# Altium PCB ZigBug_V1.1.PcbDoc
Units mil, origin at the board's own origin, x right, y up, seen from the top; angles counter-clockwise.
Board outline 1800 x 2750 mil, 4 copper layers (Top Layer, GND, VCC, Bottom Layer), stack 30.634 mil thick; 89 components, 64 nets, 356 pads, 73 vias.
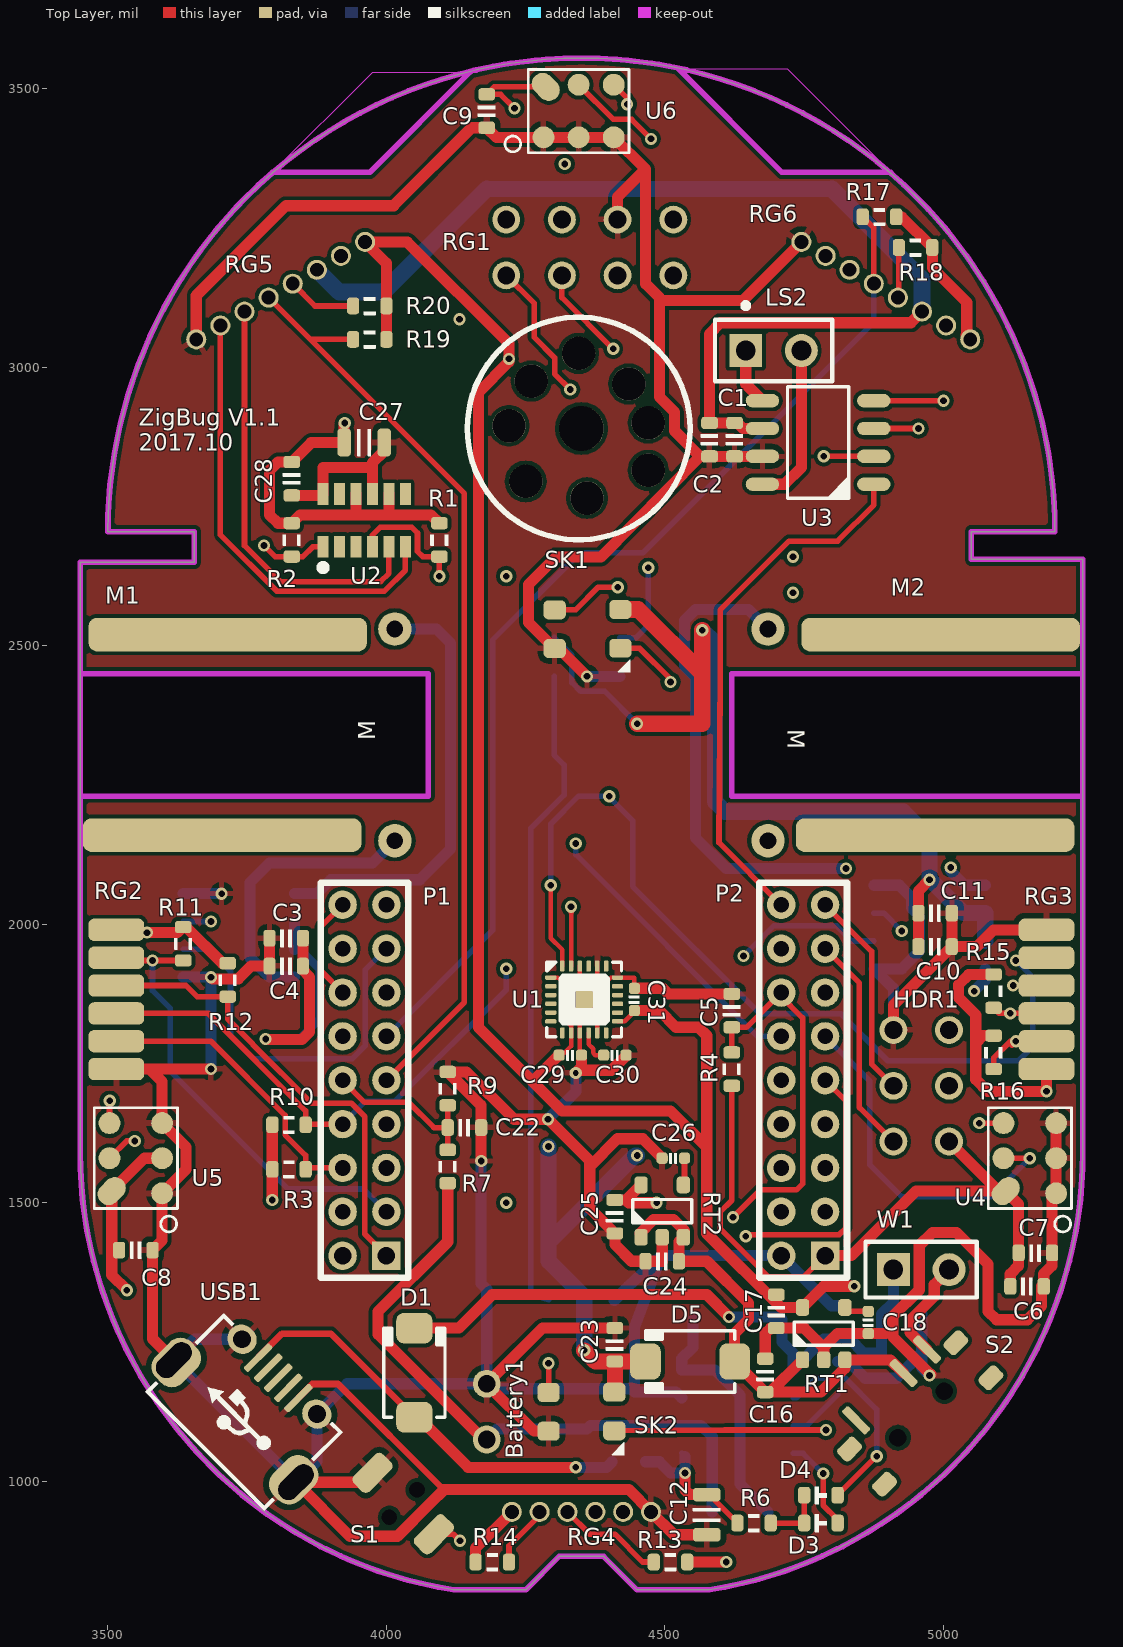
[diagram p0: Top Layer view]
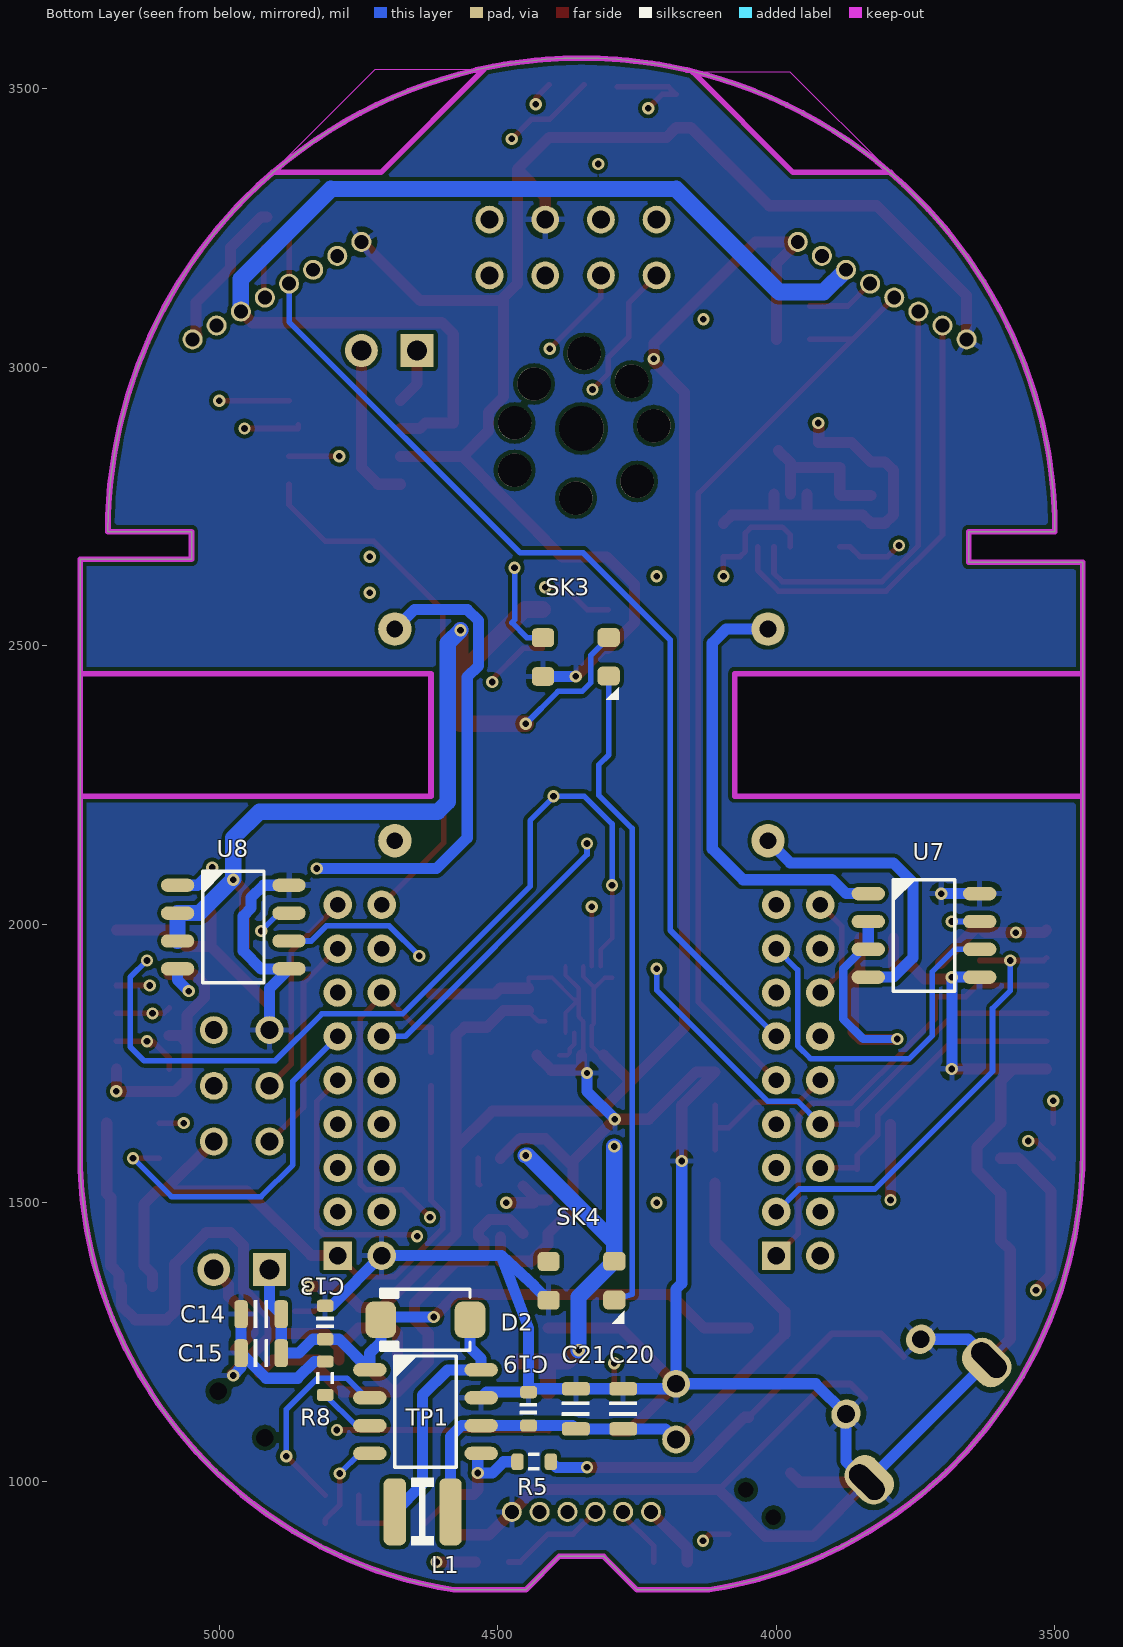
[diagram p1: Bottom Layer view, seen from below]
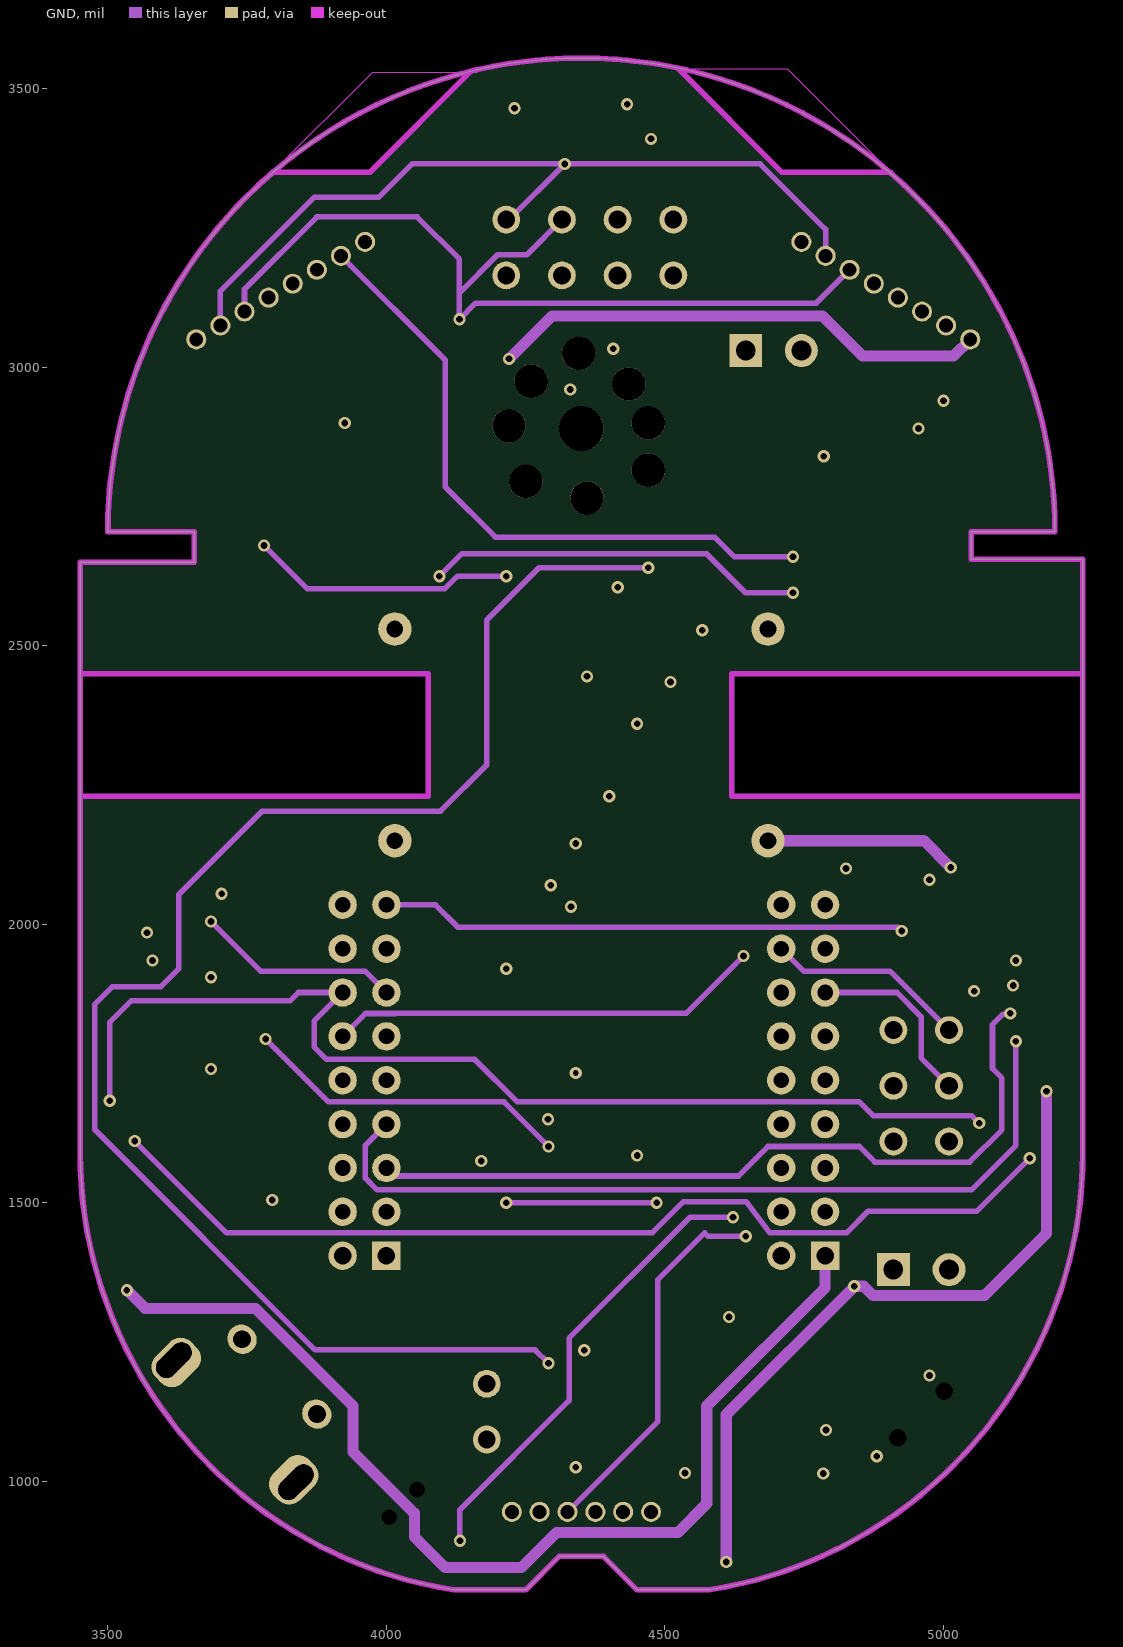
[diagram p2: GND]
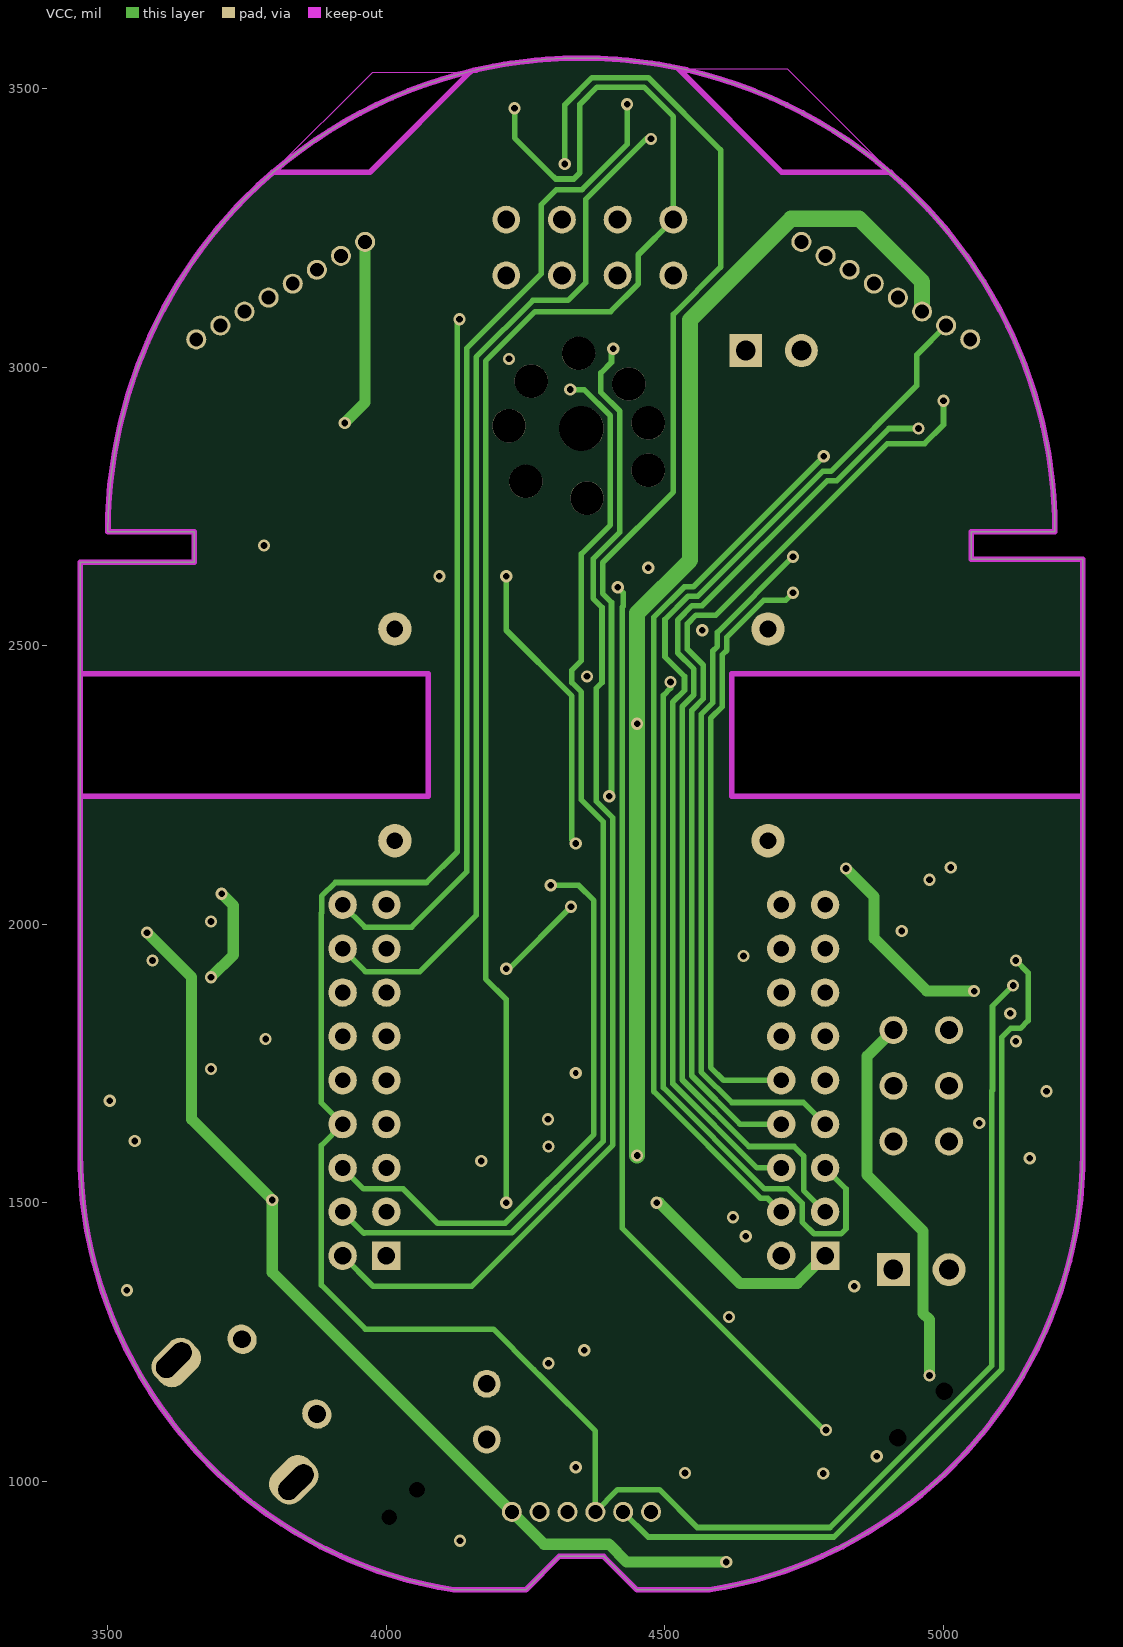
[diagram p3: VCC]
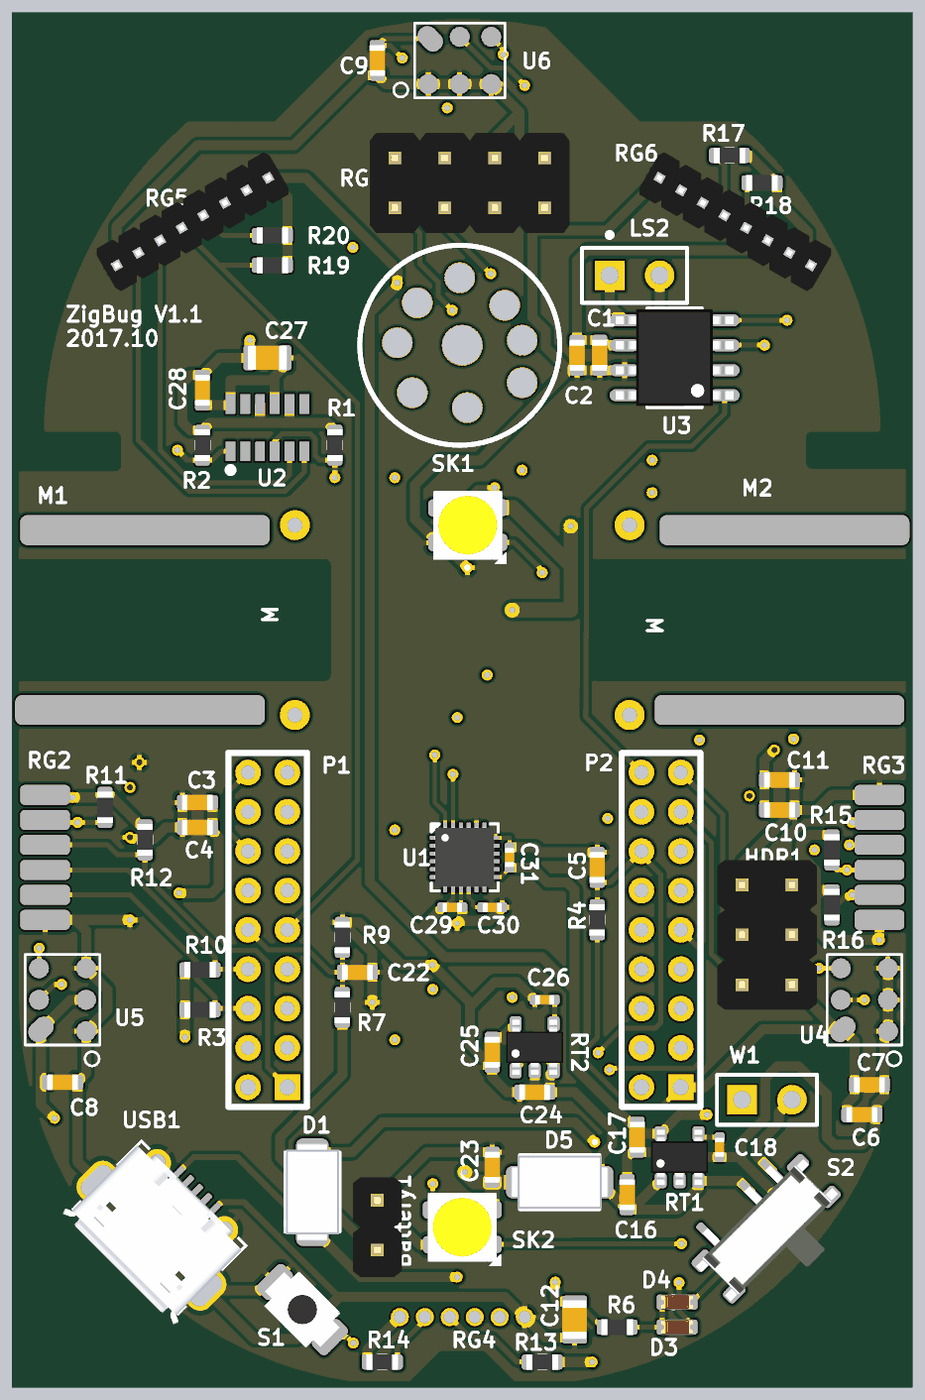
[diagram p4: 3D render of the assembled board from above, using the file's embedded part models]
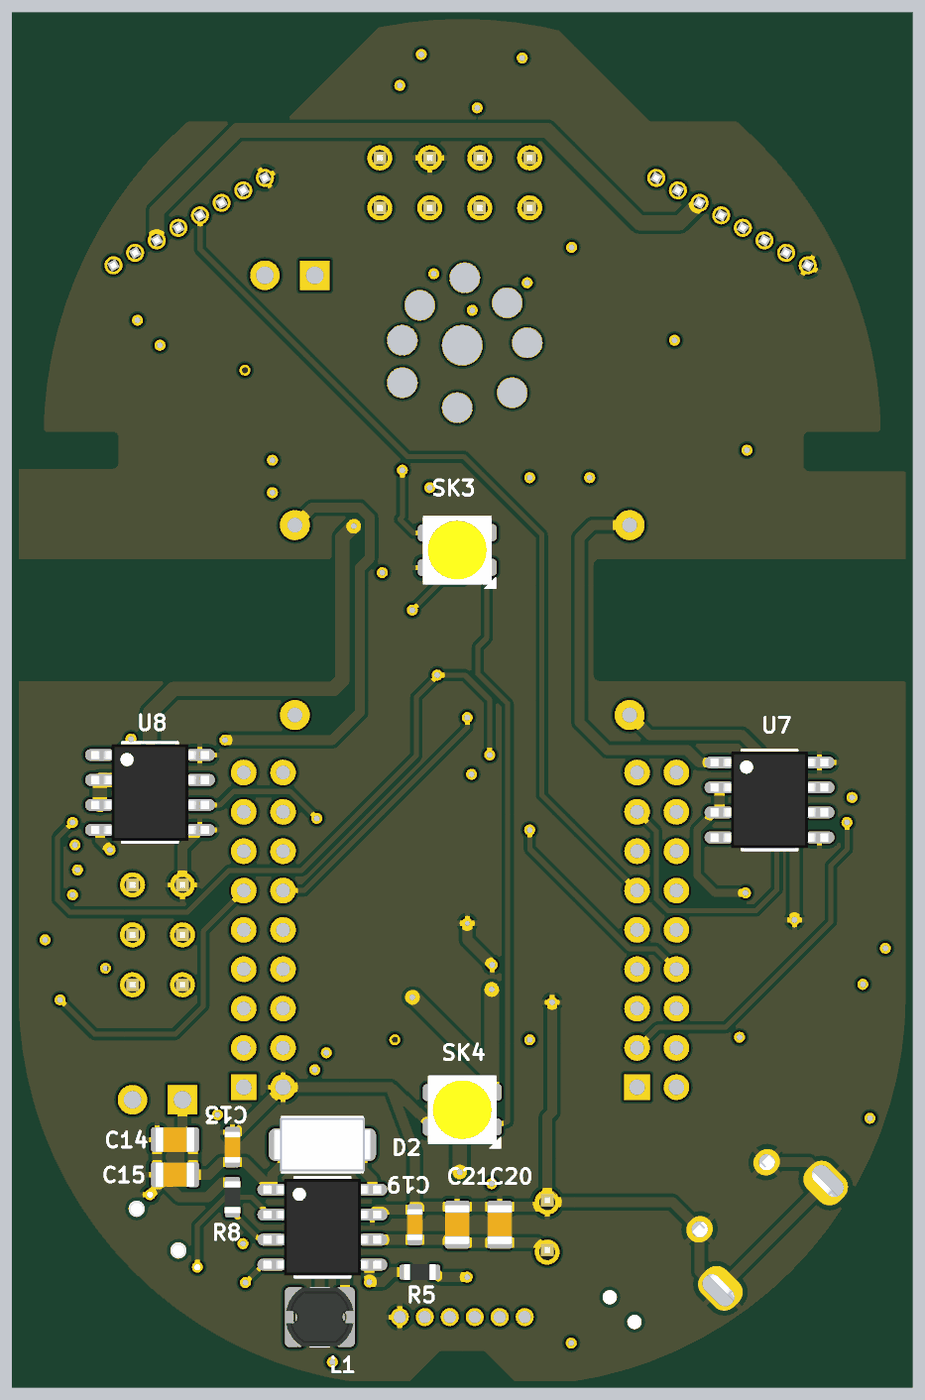
[diagram p5: 3D render of the assembled board from below, using the file's embedded part models]

## Layer stack, top to bottom
Top Solder: solder mask 0.4, Solder Resist, Dk 3.5
Top Layer: signal copper 1.4
Dielectric 1: core 10, FR-4, Dk 4.2
GND: signal copper 1.417
Dielectric 3: prepreg 5, Dk 4.2
VCC: signal copper 1.417
Dielectric 2: core 10, Dk 4.2
Bottom Layer: signal copper 1.4
Bottom Solder: solder mask 0.4, Solder Resist, Dk 3.5

## Board outline
4121,805 4250,805 4310,865 4390,865 4450,805 4579.26,805 ccw(c4454.87,1590.34) 5250,1590.34 5250,1590 5250,2655 5050,2655 5050,2705 5200,2705 ccw(c4350,2705) 3500,2705 3655,2705 3655,2650 3450,2650 3450,1590 3450.26,1590.33 ccw(c4245.38,1590.33)
cut-out: 3970,3350 3795,3350 3975,3530 4150,3530
cut-out: 4150,3530 3970,3350
cut-out: 4525,3535 4710,3350 4905,3350 4720,3535
cut-out: 5250,2450 4620,2450 4620,2230 5250,2230
cut-out: 3450,2450 4075,2450 4075,2230 3450,2230

## Design rules (kind name [scope] priority, off if disabled: settings)
Clearance Clearance_Poly [InPolygon] p1: gap=7 ignorepadtopadclearanceinfootprint=FALSE
Clearance [All] p2: gap=7 ignorepadtopadclearanceinfootprint=FALSE
MinimumSolderMaskSliver [All] p1: minsoldermaskwidth=1
PolygonConnect [All] p1: connectstyle=Relief reliefconductorwidth=10 reliefentries=4 polygonreliefangle="90 Angle" airgapwidth=10
RoutingVias [All] p1: holewidth=18 width=30 viastyle="Through Hole" minholewidth=12 minwidth=20 maxholewidth=28 maxwidth=50
SilkToSilkClearance [All] p1: silktosilkclearance=2
SilkToSolderMaskClearance [IsPad] p1: minsilkscreentomaskgap=2 clearancetoexposedcopper=TRUE
SolderMaskExpansion [All] p1: expansion=4
Width Width_VBUS [InNet('VBUS')] p1: maxlimit=30 minlimit=10 preferedwidth=20 midlayer1_maxwidth=10 midlayer1_prefwidth=10 midlayer2_maxwidth=10 midlayer2_prefwidth=10 minimp=50.000000 maximp=50.000000 favimp=50.000000
Width Width_VCC5 [InNet('VCC5V')] p2: maxlimit=30 minlimit=10 preferedwidth=29 toplayer_prefwidth=20 midlayer1_prefwidth=20 midlayer2_prefwidth=20 minimp=50.000000 maximp=50.000000 favimp=50.000000
Width Width_V28 [InNet('VCC2.8V')] p3: maxlimit=30 minlimit=7 preferedwidth=20 midlayer1_minwidth=10 midlayer2_minwidth=10 minimp=50.000000 maximp=50.000000 favimp=50.000000
Width Width_VBAT [InNet('VBAT')] p4: maxlimit=30 minlimit=10 preferedwidth=20 midlayer1_maxwidth=10 midlayer1_prefwidth=10 midlayer2_maxwidth=10 midlayer2_prefwidth=10 minimp=50.000000 maximp=50.000000 favimp=50.000000
Width Width_GND [InNet('GND')] p5: maxlimit=50 minlimit=7 preferedwidth=20 midlayer1_minwidth=10 midlayer2_minwidth=10 minimp=50.000000 maximp=50.000000 favimp=50.000000
Width [All] p6: maxlimit=30 minlimit=7 preferedwidth=10 midlayer1_minwidth=10 midlayer2_minwidth=10 minimp=50.000000 maximp=50.000000 favimp=50.000000
27 further rules are at their usual default settings.

## Classes and differential pairs
component class U_Audio: C1 C2 LS2 U3
component class U_LED: SK1 SK2 SK3 SK4
component class U_MCU: C5 HDR1 P1 P2 R4 S1
component class U_Micphone: C6 C7 C8 C9 U4 U5 U6
component class U_Motor: C3 C4 C10 C11 M1 M2 U7 U8
component class U_Power: Battery1 C12 C13 C14 C15 C16 C17 C18 C19 C20 C21 C22 C23 C24 C25 C26 D1 D2 D3 D4 D5 L1 R5 R6 R7 R8 R9 RT1 RT2 S2 TP1 USB1 W1
component class U_Sensors: C27 C28 C29 C30 C31 R1 R2 R3 R10 R11 R12 R13 R14 R15 R16 R17 R18 R19 R20 RG1 RG2 RG3 RG4 RG5 RG6 U1 U2

## Components (designator, comment, footprint, x,y, rotation, side; value= is the part's Value field where it differs from the comment)
Battery1 "Li-Po Battery" HDR1X2_2.54_180 4180,1175 r0 top
C1 "Cap_0603" CAP_0603 4625,2870 r90 top value=0.1uF
C2 "Cap_0603" CAP_0603 4580,2870 r90 top value=10uF
C3 "Cap_0603" CAP_0603 3820,1975 r0 top value=0.1uF
C4 "Cap_0603" CAP_0603 3820,1925 r0 top value=10uF
C5 "Cap_0603" CAP_0603 4620,1845 r270 top value=0.47uF
C6 "Cap_0603" CAP_0603 5150,1350 r180 top value=10uF
C7 "Cap_0603" CAP_0603 5165,1410 r180 top value=0.1uF
C8 "Cap_0603" CAP_0603 3550,1415 r180 top value=0.1uF
C9 "Cap_0603" CAP_0603 4180,3460 r90 top value=0.1uF
C10 "Cap_0603" CAP_0603 4985,1960 r180 top value=0.1uF
C11 "Cap_0603" CAP_0603 4985,2020 r180 top value=10uF
C12 "Cap_0805" CAP_0805 4575,940 r270 top value=10uF
C13 "Cap_0603" CAP_0603 4810,1285 r270 bottom value=0.1uF
C14 "Cap_0805" CAP_0805 4925,1300 r0 bottom value=22uF
C15 "Cap_0805" CAP_0805 4925,1230 r0 bottom value=22uF
C16 "Cap_0603" CAP_0603 4680,1190 r90 top value=1uF
C17 "Cap_0603" CAP_0603 4700,1305 r90 top value=1uF
C18 "Cap_0402" CAP_0402 4865,1285 r270 top value=22n
C19 "Cap_0603" CAP_0603 4445,1130 r270 bottom value=0.1uF
C20 "Cap_0805" CAP_0805 4275,1130 r90 bottom value=22uF
C21 "Cap_0805" CAP_0805 4360,1130 r90 bottom value=22uF
C22 "Cap_0603" CAP_0603 4140,1635 r0 top value=0.1uF
C23 "Cap_0603" CAP_0603 4410,1245 r270 top value=10uF
C24 "Cap_0603" CAP_0603 4495,1395 r180 top value=1uF
C25 "Cap_0603" CAP_0603 4410,1475 r90 top value=1uF
C26 "Cap_0402" CAP_0402 4515,1580 r180 top value=22n
C27 "Cap_0805" CAP_0805 3960,2865 r180 top value=10uF
C28 "Cap_0603" CAP_0603 3830,2800 r90 top value=0.1uF
C29 "Cap_0402" CAP_0402 4330,1765 r180 top value=10n
C30 "Cap_0402" CAP_0402 4410,1765 r180 top value=0.1u
C31 "Cap_0402" CAP_0402 4445,1865 r270 top value=0.1u
D1 "SchottkyDiode_SOD123" DO-214AC 4050,1195 r90 top value=SS32
D2 "SchottkyDiode_SOD123" DO-214AC 4630,1290 r0 bottom value=SS32
D3 "Green LED 0603" LED_0603_RED 4780,925 r0 top value=Green
D4 "Red LED 0603" LED_0603_RED 4780,975 r0 top value=Red
D5 "IN4001" DO-214AC 4545,1215 r180 top value=1N4001
HDR1 "HDR2x3_2.54" HDR2X3_2.54_180 4910,1810 r0 top
L1 "Ind_CD32" IND_CD32 4635,945 r180 bottom value=4.7uH
LS2 "Speaker" PIN2 4645,3030 r0 top
M1 "Geared DC Motor 6X16" Geared_DC_Motor_6X16 3685,2345 r0 top
M2 "Geared DC Motor 6X16" Geared_DC_Motor_6X16 5015,2335 r180 top
P1 "Header 9X2" HDR2X9_2.00_180F 4000,1405 r0 top locked
P2 "Header 9X2" HDR2X9_2.00_180F 4787.4,1405 r0 top locked
R1 "Res_0603" RES_0603 4095,2690 r90 top value=1K
R2 "Res_0603" RES_0603 3830,2690 r90 top value=1K
R3 "Res_0603" RES_0603 3825,1560 r180 top value=1K
R4 "Res_0603" RES_0603 4620,1740 r270 top value=5.62K
R5 "Res_0603" RES_0603 4435,1035 r180 bottom value=0.3Ohm
R6 "Res_0603" RES_0603 4660,925 r180 top value=1K
R7 "Res_0603" RES_0603 4110,1565 r270 top value=510K,1%
R8 "Res_0603" RES_0603 4810,1185 r270 bottom value=5K
R9 "Res_0603" RES_0603 4110,1705 r270 top value=1M,1%
R10 "Res_0603" RES_0603 3825,1640 r180 top value=1K
R11 "Res_0603" RES_0603 3635,1965 r90 top value=1K
R12 "Res_0603" RES_0603 3715,1900 r90 top value=1K
R13 "Res_0603" RES_0603 4510,855 r0 top value=1K
R14 "Res_0603" RES_0603 4190,855 r180 top value=1K
R15 "Res_0603" RES_0603 5090,1880 r90 top value=1K
R16 "Res_0603" RES_0603 5090,1770 r90 top value=1K
R17 "Res_0603" RES_0603 4885,3270 r0 top value=1K
R18 "Res_0603" RES_0603 4950,3215 r0 top value=1K
R19 "Res_0603" RES_0603 3970,3050 r0 top value=1K
R20 "Res_0603" RES_0603 3970,3110 r0 top value=1K
RG1 "GY530 VL53L0X" HDR2X4_2.54_180 4515,3265 r270 top
RG2 "RANGE_VL6180X_LEFT" HDR1X6_1.27_180H_SMD 3515,1990 r0 top locked
RG3 "RANGE_VL6180X_RIGHT" HDR1X6_1.27_180H_SMD 5185,1740 r180 top
RG4 "RANGE_VL6180X_REAR" HDR1X6_1.27_180 4225,945 r90 top locked
RG5 "RANGE_VL6180X_LED_LEFT" HDR1X8_1.27_180 3961.6,3225 r300 top
RG6 "RANGE_VL6180X_LED_RIGHT" HDR1X8_1.27_180 5048.11,3050 r240 top
RT1 "RT9193-28" SOT23-5 4785,1265 r90 top
RT2 "RT9193-33" SOT23-5 4495,1485 r90 top
S1 "ButtonTACT_3x4x2_180" ButtonTACT_3x4x2_180H 4030,960 r135 top
S2 "SwitchSPDT_2.8x6.6_90" SwitchSPDT_2.8X6.6_90 4960,1120 r45 top
SK1 "LED_3535_SK6812" LED_3535_4P 4361,2530 r0 top
SK2 "LED_3535_SK6812" LED_3535_4P 4350,1125 r0 top
SK3 "LED_3535_SK6812" LED_3535_4P 4360,2480 r180 bottom
SK4 "LED_3535_SK6812" LED_3535_4P 4350,1360 r180 bottom
TP1 "TP5400" SOP_E150_8 4630,1125 r180 bottom
U1 "MPU9250" QFN_P0.4_24 4355,1865 r0 top
U2 "VL6180X" LGA12_ST_4.8X2.8X1MM 3960,2725 r90 top
U3 "NS4168" SOP_E150_8 4775,2865 r180 top
U4 "MP45DT02" ST_HLGA6 5155,1580 r180 top
U5 "MP45DT02" ST_HLGA6 3550,1580 r180 top
U6 "MP45DT02" ST_HLGA6 4345,3460 r90 top
U7 "TC214B" SOP_E150_8 3735,1980 r180 bottom
U8 "TC214B" SOP_E150_8 4975,1995 r180 bottom
USB1 "USB Mini-B" USB_Micro-AB 3735,1115 r135 top
W1 "Jumper" HDR1X2 4910,1380 r0 top

## Footprints (in the part's own frame and the unit in brackets; to place one, negate y for a bottom-side part, rotate by r counter-clockwise, add the part's x,y. Pads: shape width x height; smd on the part's side, far side on the other; paste and mask are expansions set on the pad)
ButtonTACT_3x4x2_180H [mil]
  round 0 hole 28: 0(0,35) 0(0,-35)
  rrect50% 40x74 smd: 1(-78,0) 2(78,0)
  body extent -79,-49 79,49, height 63
CAP_0402 [mil]
  rrect50% 20x20 smd: 1(-20,0) 2(20,0)
  silkscreen extent -7,-9 7,9, body extent -20,-10 20,10, height 20
CAP_0603 [mil]
  rrect50% 22x30 smd: 1(-30,0) 2(30,0)
  silkscreen extent -10,-15 10,15, body extent -31,-16 31,16, height 31
CAP_0805 [mil]
  rrect50% 24x50 smd: 1(-36,0) 2(36,0)
  silkscreen extent -12,-24 12,24, body extent -39,-25 39,25, height 39
DO-214AC [mil] "SMA"
  rrect50% 55x65 smd: 1(-80,0) 2(80,0)
  silkscreen extent -80,-55 80,55, body extent -98,-53 98,53, height 85
Geared_DC_Motor_6X16 [mil] "Geared_DC_Motor_6X16"
  rrect50% 500x60 smd: 0(20,-185) 0(30,175)
  round 60 hole 30: 1(330,185) 2(330,-195)
HDR1X2 [mm] "Connector; Header; 2 Position"
  rect 1.5x1.5 hole 0.9: 1(0,0)
  round 1.5 hole 0.9: 2(2.54,0)
  silkscreen extent -1.27,-1.27 3.81,1.27
HDR1X2_2.54_180 [mil]
  round 50 hole 32: 1(0,0) 2(0,-100)
  body extent -49,-150 49,50, height 323
HDR1X6_1.27_180 [mil]
  round 36 hole 25: 1(0,0) 2(0,-50) 3(0,-100) 4(0,-150) 5(0,-200) 6(0,-250)
HDR1X6_1.27_180H_SMD [mil]
  rrect50% 100x40 smd: 1(0,0) 2(0,-50) 3(0,-100) 4(0,-150) 5(0,-200) 6(0,-250)
HDR1X8_1.27_180 [mil]
  round 36 hole 25: 1(0,0) 2(0,-50) 3(0,-100) 4(0,-150) 5(0,-200) 6(0,-250) 7(0,-300) 8(0,-350)
  body extent -49,-375 49,25, height 210
HDR2X3_2.54_180 [mil]
  round 50 hole 32: 1(0,0) 2(100,0) 3(0,-100) 4(100,-100) 5(0,-200) 6(100,-200)
  body extent -50,-250 150,50, height 335
HDR2X4_2.54_180 [mil]
  round 50 hole 32: 1(0,0) 2(100,0) 3(0,-100) 4(100,-100) 5(0,-200) 6(100,-200) 7(0,-300) 8(100,-300)
  body extent -50,-350 150,50, height 335
HDR2X9_2.00_180F [mm]
  rect 1.3x1.3 hole 0.8: 1(0,0)
  round 1.3 hole 0.8: 2(-2,0)
  round 1.3 hole 0.711: 3(0,2) 4(-2,2) 5(0,4) 6(-2,4) 7(0,6) 8(-2,6) 9(0,8) 10(-2,8) 11(0,10) 12(-2,10) 13(0,12) 14(-2,12) 15(0,14) 16(-2,14) 17(0,16) 18(-2,16)
  silkscreen extent -3,-1 1,17
IND_CD32 [mil]
  rrect50% 40x120 smd: 1(-50,0) 2(50,0)
  silkscreen extent -20,-60 20,60, body extent -68,-59 68,59, height 83
LED_0603_RED [mil]
  rrect50% 22x30 smd: 1(-30,0) 2(30,0)
  silkscreen extent -10,-16 10,16, body extent -32,-16 32,16, height 24
LED_3535_4P [mil]
  rrect50% 40x34 smd: 1(-59,34.45) 2(-59,-35) 3(59,-34.45) 4(59,35)
  silkscreen extent 55,-77 77,-55, body extent -69,-69 69,69, height 26
LGA12_ST_4.8X2.8X1MM [mm] "VL6180, LGA12 4.8X2.8X1MM"
  rect 1x0.5 smd: 1(-1.2,1.875) 2(-1.2,1.125) 3(-1.2,0.375) 4(-1.2,-0.375) 5(-1.2,-1.125) 6(-1.2,-1.875) 7(1.2,-1.875) 8(1.2,-1.125) 9(1.2,-0.375) 10(1.2,0.375) 11(1.2,1.125) 12(1.2,1.875)
  silkscreen extent -2.3,1.72 -2,2.02
PIN2 [mm] "Photosensitive Diode; 2 Leads"
  rect 1.5x1.5 hole 0.9: 1(0,0)
  round 1.5 hole 0.9: 2(2.54,0)
  silkscreen extent -1.4,-1.4 3.94,2.17
QFN_P0.4_24 [mil]
  rrect20% 32x32 smd: 0(0,0)
  rrect50% 20x8 smd: 1(-60,39.37) 2(-60,23.62) 3(-60,7.87) 4(-60,-7.87) 5(-60,-23.62) 6(-60,-39.37) 13(60,-39.37) 14(60,-23.62) 15(60,-7.87) 16(60,7.87) 17(60,23.62) 18(60,39.37)
  rrect50% 8x20 smd: 7(-39.37,-60) 8(-23.62,-60) 9(-7.87,-60) 10(7.87,-60) 11(23.62,-60) 12(39.37,-60) 19(39.37,60) 20(23.62,60) 21(7.87,60) 22(-7.87,60) 23(-23.62,60) 24(-39.37,60)
  silkscreen extent -67,-67 67,67, body extent -60,-60 60,60, height 39
RES_0603 [mil]
  rrect50% 22x30 smd: 1(-30,0) 2(30,0)
  silkscreen extent -10,-16 10,16, body extent -31,-16 31,16, height 18
SOP_E150_8 [mil]
  oval 60x24 smd: 1(-100,75) 2(-100,25) 3(-100,-25) 4(-100,-75) 5(100,-75) 6(100,-25) 7(100,25) 8(100,75)
  silkscreen extent -55,-100 55,100, body extent -118,-96 118,96, height 69
SOT23-5 [mil]
  rrect50% 30x24 smd: 1(-47,38) 2(-47,0) 3(-47,-38) 4(47,-38) 5(47,38)
  silkscreen extent -21,-53 21,53, body extent -55,-57 55,57, height 57
ST_HLGA6 [mm]
  round 1 smd paste-25.4: 1(-1.2,1.6) 2(-1.2,0) 3(-1.2,-1.6) 4(1.2,-1.6) 5(1.2,0)
  oval 1x1.4 smd rot 135 paste-25.4: 6(1.1,1.5)
  silkscreen extent -1.9,-2.3 1.9,3.36
SwitchSPDT_2.8X6.6_90 [mil]
  rrect50% 42x30 smd: 0(-135,47) 0(-135,-42) 0(135,-42) 0(135,47)
  round 10 hole 31.5: 0(-59.05,0) 0(59.05,0)
  rrect50% 16x60 smd: 1(90,75) 2(30,75) 3(-90,75)
  body extent -152,-111 151,86, height 55
USB_Micro-AB [mil]
  rrect80% 68x90 hole 37 slot 75 at 90 deg copper offset 6,0 mask+0: 0(-155,10)
  oval 54x50 hole 32 mask+0: 0(-95,-103) 0(95,-103)
  rrect80% 68x90 hole 37 slot 75 at 90 deg copper offset -6,0 mask+0: 0(155,10)
  rrect50% 12x64 smd: 1(51.18,-100) 2(25.59,-100) 3(0,-100) 4(-25.59,-100) 5(-51.18,-100)
  silkscreen extent -151,-113 151,86, body extent -161,-109 161,104, height 108

## Part data
Battery1: library part Battery_LiPo, "Li-Po Rechargable Battery"
C1 C2 C3 C4 C5 C6 C7 C8 C9 C10 C11 C12 C13 C14 C15 C16 C17 C18 C19 C20 C21 C22 C23 C24 C25 C26 C27 C28 C29 C30 C31: "Capacitor"
D1 D2: "Diode"
D3 D4: library part LED_0603, "LED"
D5: library part Diode_SMA, "Diode"
HDR1: "Header"
L1: "Inductor"
LS2: "Loudspeaker", LatestRevisionDate=17-Jul-2002, LatestRevisionNote="Re-released for DXP Platform.", PackageReference=PIN2, Published=24-Mar-1999, Publisher="Altium Limited"
M1 M2: library part GearMotor_DC_6X16, "Geared DC Motor, 6mm D, L=16mm"
P1 P2: "Header, 9-Pin, Dual row", LatestRevisionDate=17-Jul-2002, LatestRevisionNote="Re-released for DXP Platform.", Publisher="Altium Limited"
R1 R2 R3 R4 R5 R6 R7 R8 R9 R10 R11 R12 R13 R14 R15 R16 R17 R18 R19 R20: "Resistor"
RG1: library part GY530-VL53L0X, "For font range detection VL53L0X"
RG2 RG3 RG4: library part RANGE_VL6180X
RG5 RG6: library part RANGE_VL6180X_LED
RT1 RT2: library part RT9193, "Power"
S1: "Button"
S2: "Switch"
SK1 SK2 SK3 SK4: "LED"
TP1: "Charge"
U1: library part MPU925x, "Sensor Motion"
U2: "VL6180x Proximity and Light Sensor with Gesture Recognition    Supply Level: 2.8V (3.0V Max!)  Range: 0-10cm  Light Sensor: 0..100K Lux (16-bit output)  IR emitter: 850 nm  I2C Address: 0x29 (7-bit)", VDD="VDD: 2.8V  / Op. Temp: -20~70°C"
U3: "D Class Audio Amp with I2S input"
U4 U5 U6: "Mic Omni-Directional -26dB 3.6V Rectangular Solder Pad", Package=None, Availability=Good, MF=STMicroelectronics, MP=MP45DT02, Price="2.57 USD", Value=*
U7 U8: "DC Motor Driver 1 Channel  (Cheap Replacement of L9110)"
USB1: library part USB_Micro, "USB"
W1: "Jumper Wire", LatestRevisionDate=17-Jul-2002, LatestRevisionNote="Re-released for DXP Platform.", PackageDescription="Radial Cap, Thru-Hole; 2 Leads; 0.2 in Pin Spacing", PackageReference=RAD-0.2, Published=24-Mar-1999, Publisher="Altium Limited"

## Free pads (board coordinates)
  round 60 hole 60: 5(4220,2895) 5(4250,2795) 5(4260,2975) 5(4345,3025) 5(4360,2765) 5(4435,2970) 5(4470,2815) 5(4470,2900)
  round 80 hole 80: 5(4350,2890)

## Via types
v1: diameter 22, hole 12, Top Layer to Bottom Layer, 72 vias
v2: diameter 22, hole 10, Top Layer to Bottom Layer, 1 vias

## Nets (pads, with @x,y where several pads share a name; then routed paths per layer and width w, separated by ;. In a path a pad name is that pad's centre, name@x,y a point inside that pad or via, vN(x,y) a via of type N, cw(c..) or ccw(c..) an arc to the next point about the centre after c; other vN are vias at no path point)
Debug_RX: HDR1.3 P2.17 | length 375.7
  Top Layer w10: P2.17 4871,1951.32 4871,1749 HDR1.3
Debug_TX: HDR1.5 P2.15 | length 397
  Top Layer w10: P2.15 4849,1894.58 4849,1671 HDR1.5
GND: Battery1.1 C1.1 C2.1 C3.1 C4.1 C5.1 C6.1 C7.1 C8.1 C9.1 C10.1 C11.1 C12.2 C13.1 C14.2 C15.2 C16.2 C17.1 C18.2 C19.1 C20.2 C21.2 C22.2 C23.1 C24.2 C25.1 C26.2 C27.1 C28.1 C29.1 C30.1 C31.1 HDR1.1 P2.2 R8.1 R9.1 RG1.3 RG2.6 RG3.6 RG4.6 RG5.8 RG6.8 RT1.2 RT2.2 S1.2 SK1.2 SK2.2 SK3.2 SK4.2 TP1.7 U1.0 U1.9 U1.11 U1.18 U1.20 U2.9 U2.12 U3.7 U4.1 U4.2 U4.3 U5.1 U5.3 U6.1 U6.2 U6.3 U7.5 U7.8 U8.5 U8.8 USB1.0 USB1.5 | length 13504.3
  Top Layer w7: U1.0 4363.7,1865 4403.07,1904.37 U1.18
  Top Layer w8: C29.1@4347.13,1767.87 U1.9 4347.13,1826.12 4355,1834 U1.0 ; U1.11 4378.62,1841.38 U1.0 ; U1.20 4378.62,1908.62 4355,1885 U1.0 ; U1.18 4445,1904.37 C31.1
  Top Layer w12: USB1.5 3866.9,1174.52 3913.06,1174.52 4102.83,984.75
  Top Layer w20: RG2.6 3575,1740 ; USB1.0@3618.33,1217.53 3580,1255.86 C8.1 3597.24,1432.24 U5.1 3640,1559.76 3640,1600.24 U5.3 3597.24,1717.76 3575,1740 ; USB1.0@3618.33,1242.53 USB1.0@3643.33,1242.53 ; RG5.8 3658.49,3128.49 3820,3290 4013,3290 4153,3430 C9.1 4197.24,3412.76 U6.1 U6.2 U6.3 4465,3355.75 ; v1(3685,1740) 3575,1740 ; v1(3685,1905) 3688,1902 3733.82,1902 3756.82,1925 C4.1 C3.1 ; C28.1 3883.94,2770 U2.12 3886.18,2820 3970.84,2820 ; U2.9 3974.76,2828.76 C27.1@3996,2850 ; S1.2 3958.02,998.33 3837.53,998.33 3934.61,901.25 4019.33,901.25 4079.09,961.01 4102.83,984.75 4103.08,985 4435,985 RG4.6 4516,904 C12.2 ; v1(4170,1575) C22.2 4170,1675 R9.1 4144,1735 4229,1650 v1(4290,1650) 4365,1575 4365,1565 ; SK2.2 4265,1090 Battery1.1 4280,1275 C23.1 ; v2(4340,1733) v2@4345,1738 ; C29.1 4350,1743 v2@4345,1738 ; v1(4360,2445) 4310,2495 SK1.2 4255,2542 4255,2610 4304.52,2659.52 4385,2659.52 4563,2840 ; RG1.3 4415,3305.75 4465,3355.75 ; C30.1 4430,1763.89 4404.11,1738 v2@4345,1738 ; C31.1 4496,1885 4506,1875 C5.1 ; RT2.2 4495,1395 C24.2 4440,1395 4410,1425 C25.1 4365,1490 4365,1565 ; C26.2 4460,1615 4415,1615 4365,1565 ; U3.7 C1.1 C2.1 4563,2840 ; C16.2 4680,1265 4690,1275 C17.1 4750,1275 4785,1240 ; RG6.8 4640,3120 4490,3120 ; RT1.2 4785,1240 ; 4895.61,1265 C18.2 4810,1265 4785,1240 ; HDR1.1 4910,1855 C10.1 ; v1@4977.05,1192.05 4908.86,1260.24 4908.86,1295.76 4956.53,1343.43 4956.53,1423.06 4980,1446.53 5023.47,1446.53 5080,1390 5080,1305 5095,1290 5150.9,1290 5175.9,1315 5175.9,1350.64 C6.1@5179.36,1350.64 ; C11.1 C10.1 ; C6.1 5180,1372 5195,1387 C7.1 5195,1509.76 U4.1 U4.2 U4.3 ; RG3.6 5090,1990 5060,1960 C10.1 ; 4465,3355.75 4465,3150 4490,3125 4490,3120 ; 4490,3120 4490,2946.47 4517,2919.47 4517,2886 4563,2840
  VCC w20: v1(3685,1905) 3725,1945 3725,2034 v1(3704,2055) ; HDR1.1 4863,1763 4863,1550 4963.47,1449.53 4963.47,1301.53 4975,1290 v1(4975,1190)
  Bottom Layer w20: U7.5 v1(3685,1905) v1(3685,1740) ; U7.8 v1(3704,2055) ; USB1.0@3740.66,1255.01 3655.81,1255.01 3618.33,1217.53 3837.53,998.33 3875.01,1035.81 3875.01,1120.66 3929.35,1175 Battery1.1 ; v1(4170,1575) 4170,1355 4180,1345 Battery1.1 ; v1(4290,1650) 4340,1700 v2(4340,1733) ; v1(4360,2445) SK3.2 ; SK4.2 4434,1350 4493.66,1405 ; TP1.7 4520,1160 C19.1 ; P2.2@4706.06,1405 4493.66,1405 ; P2.2 4798.66,1315 C13.1 ; R8.1 4829.35,1215 4859.35,1185 4916,1185 C15.2 ; U8.8 4921,2070 4943,2048 4943,2029 4957,2015 4957,1952 4925,1920 U8.5 4910,1885 HDR1.1 ; C14.2 C15.2 ; v1(4975,1190) 4961,1204 C15.2 ; Battery1.1 4189,1166 C20.2 C21.2 4439,1166 C19.1 ; C19.1 4445,1275 4493.66,1405
GPIO_OUT: P2.12 R2.1 U2.1 | length 1654.3
  Top Layer w10: v1(3780,2680) 3800,2660 R2.1 3850,2660 3867.76,2677.76 U2.1
  GND w10: v1(3780,2680) 3858,2602 4104.53,2602 4127.53,2625 v1(4215,2625)
  VCC w10: v1(4215,2625) 4215,2527.77 4333,2409.77 4333,2152 v1(4340,2145)
  Bottom Layer w10: v1(4340,2145) 4340,2125 4666.3,1798.7 P2.12
I2S_BCK: P2.3 U3.3 | length 1915.3
  Top Layer w10: U3.3@4858,2897.04 4858,2890 U3.3 v1(4955,2890)
  VCC w10: P2.3 4749,1522.14 4749,1584 4732,1601 4650.92,1601 4531,1720.92 4531,2391 4552,2412 4552,2458 4523,2487 4523,2546.23 4548.77,2572 4567,2572 4791,2796 4808.23,2796 4902.23,2890 v1(4955,2890)
I2S_DATA: P2.8 U3.4 | length 1804.8
  Top Layer w10: U3.4 v1(5000,2940)
  VCC w10: P2.8 4634.74,1641.22 4548,1727.96 4548,2383.96 4569,2404.96 4569,2465.04 4540,2494.04 4540,2539.18 4555.82,2555 4591.27,2555 4899.27,2863 4966.18,2863 5000,2896.82 v1(5000,2940)
I2S_WS: P2.4 U3.2 | length 1684.2
  Top Layer w10: v1(4785,2840) U3.2
  VCC w10: P2.4 4684.51,1507.89 4671.9,1507.89 4480,1699.79 4480,2551.31 4534.69,2606 4551,2606 v1(4785,2840)
INTM: U1.12
LED_DATA: P2.5 SK1.3 | length 1436.9
  Top Layer w10: SK1.3 4454.45,2495.55 4510,2440 v1(4510,2435)
  VCC w10: v1(4510,2435) 4510,2424 4497,2411 4497,1706.83 4678.95,1524.89 4720.68,1524.89 4746.25,1499.31 4746.25,1465.75 4768,1444 4816,1444 4825,1453 4825,1524.88 P2.5
MCU_RESET: C5.2 P2.14 R4.1 S1.1 | length 1547.4
  Top Layer w10: S1.1 4120,904.85 v1(4131.85,893) ; R4.1 C5.2 4646.22,1815 P2.14@4705.11,1873.89 ; v1(4622,1474) 4671,1523 4736,1523 4747,1534 4747,1832 P2.14@4705.11,1873.89 ; P2.14 P2.14@4705.11,1873.89
  GND w10: v1(4131.85,893) 4131.85,948.85 4328,1145 4328,1257 4545,1474 v1(4622,1474)
NetC12_1: C12.1 R5.1 R6.2 TP1.5 | length 266.2
  Top Layer w10: C12.1 4579,976 R6.2
  Top Layer w20: v1(4536,1015) 4536,984 4544,976 C12.1
  Bottom Layer w10: TP1.5 TP1.5@4536,1044
  Bottom Layer w20: R5.1 4490,1035 4510,1015 v1(4536,1015) TP1.5@4536,1044
NetC13_2: C13.2 C14.1 C15.1 D1.2 D2.2 TP1.1 W1.1 | length 1152.6
  Top Layer w20: D1.2 4130,1275 4190,1335 4575,1335 v1(4615,1295)
  Bottom Layer w10: C13.2 4825,1255
  Bottom Layer w20: v1(4615,1295) 4705,1295 D2.2 4710,1250 4730,1230 TP1.1 4785,1255 C13.2 ; 4825,1255 4831.77,1255 4856.77,1230 C15.1 C14.1 4910,1321 W1.1
NetC18_1: C18.1 RT1.4 | length 44.9
  Top Layer w10: RT1.4 4830,1305 C18.1
NetC22_1: C22.1 P1.10 R7.1 R9.2 | length 303.9
  Top Layer w10: P1.10 3960.91,1680.31 4040,1680.31 4085.31,1635 C22.1 ; R7.1 C22.1 ; R9.2 C22.1
NetC26_1: C26.1 RT2.4 | length 48.8
  Top Layer w10: RT2.4 4535,1534 C26.1
NetC30_2: C30.2 U1.10 | length 60
  Top Layer w8: U1.10 4362.87,1784.75 4371,1776.63 4371,1769 4375,1765 C30.2
NetD2_1: D2.1 L1.1 TP1.8 | length 452.6
  Bottom Layer w20: D2.1 4550,1240 4530,1220 TP1.8 4590,1200 4635,1155 4635,995 L1.1
NetD3_1: D3.1 D4.1 R6.1 | length 110
  Top Layer w10: R6.1 D3.1 D4.1
NetD3_2: D3.2 TP1.4 | length 168.7
  Top Layer w10: v1(4784,1014) 4784,957.01 4810,931.01 D3.2
  Bottom Layer w10: TP1.4 4748,1050 v1(4784,1014)
NetD4_2: D4.2 TP1.2 | length 370.7
  Top Layer w10: D4.2 v1(4880,1045)
  Bottom Layer w10: TP1.2 4736.18,1150 4771.18,1185 4823.99,1185 4880,1128.99 v1(4880,1045)
NetLS2_1: LS2.1 U3.5 | length 102.4
  Top Layer w20: LS2.1 4645,2970 U3.5
NetLS2_2: LS2.2 U3.8 | length 292.4
  Top Layer w20: U3.8 4715,2790 4745,2820 LS2.2
NetM1_1: M1.1 U7.1 | length 793.5
  Bottom Layer w20: U7.1 3875,2055 3900,2080 4060,2080 4115,2135 4115,2505 4090,2530 M1.1
NetM1_2: M1.2 U7.4 | length 520.6
  Bottom Layer w20: U7.4 3790,1905 3755,1940 3755,2075 3790,2110 3975,2110 M1.2
NetM2_1: M2.1 U8.1 | length 426.7
  GND w20: M2.1 4965,2150 v1(5013,2102)
  Bottom Layer w10: v1@5013,2096 v1(5013,2102)
  Bottom Layer w20: v1@5013,2096 5039,2070 U8.1
NetM2_2: M2.2 U8.4 | length 1277.2
  VCC w20: v1(4825,2100) 4875,2050 4875,1975 4970,1880 v1(5055,1880)
  Bottom Layer w20: M2.2 4650,2565 4555,2565 4535,2545 4535,2464 4555,2444 4555,2155 4610,2100 v1(4825,2100) ; v1(5055,1880) 5075,1900 U8.4
NetP1_1: P1.1 R12.1 RG2.3 | length 833
  Top Layer w10: RG2.3 3640,1890 3660,1870 R12.1 3715,1830 3760,1785 3760,1784.47 3865.66,1678.81 3936.83,1678.81 3961,1654.64 3961,1444 P1.1
NetP1_2: P1.2 RG1.6 | length 2278.6
  Top Layer w10: RG1.6 4315,3125 v1(4407,3033)
  VCC w10: P1.2 3976.26,1350 4152.77,1350 4406.5,1603.73 4406.5,2190.97 4377,2220.47 4377,2423.82 4387,2433.82 4387,2569 4371,2585 4371,2656.04 4419,2704.04 4419,2921 4385,2955 4385,2990 4404,3009 4404,3030 v1(4407,3033)
NetP1_3: P1.3 R11.1 RG2.2 | length 826.8
  Top Layer w10: RG2.2 3520,1935 v1(3580,1935) R11.1
  Bottom Layer w10: v1(3580,1935) 3580,1881 3612,1849 3612,1736 3823.26,1524.74 3959,1524.74 P1.3
NetP1_4: P1.4 RG1.8 | length 2251.3
  Top Layer w10: RG1.8 4265,3115 4265,3054 4302,3017 4302,2988 v1(4330,2960)
  VCC w10: P1.4 3960,1445 3961.15,1446.15 4224.88,1446.15 4389.5,1610.77 4389.5,2183.93 4350,2223.43 4350,2416.82 4333,2433.82 4333,2456.18 4350,2473.18 4350,2665 4402,2717 4402,2913 4355,2960 v1(4330,2960)
NetP1_5: P1.5 R15.1 RG3.3 | length 1490.4
  Top Layer w10: R15.1 5100,1840 v1(5120,1840) RG3.3
  GND w10: P1.5 4014.48,1548 4632,1548 4685,1601 4849,1601 4877,1573 5047,1573 5105,1631 5105,1724 5088,1741 5088,1819.82 5107,1838.82
NetP1_7: P1.7 R16.1 RG3.2 | length 1647.1
  Top Layer w10: R16.1 5090,1760 5120,1790 v1(5130,1790) ; v1@5123,1783 v1(5130,1790) ; RG3.2 v1(5130,1790)
  GND w10: P1.7 3962,1603.22 3962,1544 3983,1523 5050,1523 5130,1603 v1(5130,1790)
NetP1_9: P1.9 R19.1 RG5.5 | length 1685.3
  Top Layer w10: RG5.5 3863.4,3050 ; R19.1 3863.4,3050 ; P1.9 4140,1859.96 4140,2773.4 3863.4,3050
NetP1_11: P1.11 R17.1 RG6.5 | length 1908.3
  Top Layer w10: R17.1 4874.9,3250.1 RG6.5
  Bottom Layer w10: P1.11 4190.57,1989.27 4190.57,2510.57 4347,2667 4460.3,2667 4874.9,3081.6 RG6.5
NetP1_12: P1.12 U8.6 | length 1047.1
  GND w10: P1.12 3962.41,1839.85 4015.57,1839.85 4015.72,1840 4538,1840 v1(4641,1943)
  Bottom Layer w10: v1(4641,1943) 4695,1997 4808.1,1997 4835.1,1970 U8.6
NetP1_13: P1.13 U7.7 | length 417.8
  GND w10: v1(3685,2005) 3774,1916 3961.44,1916 P1.13
  Bottom Layer w10: U7.7 v1(3685,2005)
NetP1_14: P1.14 P1.18 U4.4 U5.4 U6.4 | length 4073.6
  Top Layer w10: U5.4 3502.76,1682.76 v1(3503,1683) ; P1.14 3883,1915.7 3883,1996.66 P1.18 ; U6.4 4432,3483.24 v1(4432,3472) ; v1(5064,1642.99) U4.4
  GND w10: v1(3503,1683) 3503,1824 3542,1863 3827.56,1863 3842,1877.44 P1.14 3870,1826.18 3870,1780 3892.45,1757.55 4158.49,1757.55 4235.04,1681 4849,1681 4874,1656 5050.99,1656 v1(5064,1642.99)
  VCC w10: P1.18 3961.18,1995 4045,1995 4144,2094 4144,3034 4278,3168 4278,3292 4305,3319 4351,3319 4432,3400 v1(4432,3472)
NetP1_15: P1.15 U7.6 | length 675.2
  Bottom Layer w10: U7.6 3680,1955 3720,1915 3720,1800 3761.24,1758.76 3938.76,1758.76 3961.82,1781.82 3961.82,1918 P1.15
NetP1_16: P1.16 U6.5 | length 2035.2
  Top Layer w10: U6.5 4407.24,3445 4440,3445 v1(4475,3410)
  VCC w10: P1.16 3962.41,1915.03 4060.03,1915.03 4161,2016 4161,3018.23 4262.77,3120 4325.96,3120 4358,3152.04 4358,3292.04 4358.04,3292.08 4358.04,3302 4466.04,3410 v1(4475,3410)
NetP1_17: P1.17 U8.7 | length 1007.7
  GND w10: P1.17 4088,2034.92 4127.92,1995 4918,1995 v1(4925,1988)
  Bottom Layer w10: U8.7 4893,2020 v1(4925,1988)
NetP2_6: P2.6 RG6.2 | length 1869.7
  VCC w10: P2.6 4665.4,1562.48 4514,1713.88 4514,2399 4535,2420 4535,2445 4500,2480 4500,2547.27 4541.73,2589 4559,2589 4783,2813 4798,2813 4952,2967 4952,3022.19 RG6.2
NetP2_7: P2.7 RG5.2 | length 2423.4
  GND w10: RG5.2 4105.52,3012.78 4105.52,2785 4195.52,2695 4589,2695 4624,2660 v1(4730,2660)
  VCC w10: v1(4730,2660) 4594,2524 4594,2499 4586,2491 4586,2397.92 4565,2376.92 4565,1735 4620,1680 4748.62,1680 P2.7
NetP2_9: P2.9 R13.1 RG4.3 | length 1338.2
  Top Layer w10: RG4.3 4365,905 4410,905 4460,855 R13.1 ; v1(4645,1440) 4647.59,1442.59 4812.59,1442.59 4825,1455 4825,1682.36 P2.9
  GND w10: RG4.3 4487.33,1107.33 4487.33,1362.04 4571.3,1446 4577.3,1440 v1(4645,1440)
NetP2_11: P2.11 U4.5 U5.5 | length 2490
  Top Layer w10: U5.5 3533.76,1611 v1(3548,1611) ; U4.5 v1(5155,1580)
  GND w10: v1(3548,1611) 3713,1446 4477,1446 4532.44,1501.44 4646,1501.44 4688,1446 4826,1446 4865,1485 5060,1485 v1(5155,1580)
  Bottom Layer w10: P2.11 4868,1718.1 4868,1568 4925,1511 5086,1511 v1(5155,1580)
NetP2_18: P2.18 U3.1 | length 966.6
  Top Layer w10: P2.18 4597,2146.58 4598.95,2450 4598.95,2563.95 4723,2688 4810,2688 4875,2753 U3.1
NetR8_2: R8.2 TP1.3 | length 102.8
  Bottom Layer w10: TP1.3 4755,1100 R8.2
NetR14_1: R14.1 RG4.2 | length 112.8
  Top Layer w10: R14.1 4220,883.89 4275,938.89 RG4.2
NetR18_1: R18.1 RG6.4 | length 90.7
  Top Layer w10: RG6.4 4920,3126.8 R18.1
NetR20_1: R20.1 RG5.4 | length 124.9
  Top Layer w10: RG5.4 3871.7,3110 R20.1
NetS2_1: S2.1 W1.2 | length 185
  Top Layer w20: S2.1 4940,1267.28 4940,1288.72 4983.53,1332.25 4983.53,1353.53 W1.2
NetSK1_1: SK1.1 SK2.3 | length 2181.9
  Top Layer w10: SK1.1 4339.45,2564.45 4380,2605 v1(4415,2605) ; SK2.3 4607.45,1092 v1(4789,1092)
  VCC w10: v1(4415,2605) 4425,2595 4425,2571.26 4423,2569.26 4423,2348.82 4423.5,2348.32 4423.5,1596.68 4423,1596.18 4423,1454.47 4785.47,1092 v1(4789,1092)
NetSK2_1: SK2.1 SK3.1 | length 2982.3
  Top Layer w10: SK2.1 v1(4291,1212)
  GND w10: v1(4291,1212) 4267,1236 3872,1236 3476,1632 3476,1856 3508,1888 3595,1888 3627,1920 3627,2053 3777,2203 4097,2203 4180,2286 4180,2546 4274,2640 v1(4470,2640)
  Bottom Layer w10: SK3.1 4448,2514.45 4475,2541.45 4470,2546.45 v1(4470,2640)
NetSK3_3: SK3.3 SK4.3 | length 1175.5
  Bottom Layer w10: SK4.3 4259,1336 4259,2172 4319,2232 4319,2286 4301,2304 SK3.3
SCL: P1.8 R10.1 RG1.5 RG2.4 RG3.4 RG4.4 RG5.6 RG6.6 U1.23 U2.5 | length 7904.6
  Top Layer w8: U1.23 v1@4331.38,2021.38
  Top Layer w10: RG2.4 3680,1840 3855,1665 R10.1 3856.22,1641.22 P1.8 ; RG5.6 3745.1,2679.9 3810,2615 3989.29,2615 4004.29,2630 U2.5 ; v1@4331.38,2021.38 v1(4331.38,2031.38) ; v1(5125,1890) RG3.4
  GND w10: RG5.6 3745.1,3140.1 3875,3270 4055,3270 4131,3194 4131,3135 ; RG1.5 4252,3202 4199.67,3202 4132.67,3135 4131,3135 ; RG6.6 4771.6,3115 4160,3115 v1(4131,3086) 4131,3135
  VCC w10: v1(4131,3086) 4127,3082 4127,2130.08 4071.92,2075 3908.18,2075 3883.67,2050.49 3883.67,2020.67 3883,2020 3883,1679.48 P1.8 3883,1602.96 3883,1352 3962,1273 4192,1273 4264,1201 4264,1200.82 4279.82,1185 4280,1185 4375,1090 RG4.4 4415,985 4490,985 4558,917 4796.24,917 5087,1207.76 5087,1701 5088,1702 5088,1853 v1(5125,1890) ; v1(4215,1920) 4220,1920 v1(4331.38,2031.38)
  Bottom Layer w10: P1.8 3962.41,1682.37 4015.57,1682.37 4215,1881.8 v1(4215,1920)
SDA: P1.6 R3.1 RG1.7 RG2.5 RG3.5 RG4.5 RG5.7 RG6.7 U1.24 U2.6 | length 8804.7
  Top Layer w8: v1(4295,2070) 4295,1975 4315.38,1954.62 U1.24@4315.38,1925
  Top Layer w10: RG2.5 3684.75,1790 3818,1656.75 3818,1622 3855,1585 R3.1 3857.48,1562.48 P1.6 ; RG5.7 3701.79,2699.16 3802.96,2598 3996.33,2598 4033.82,2635.49 U2.6
  GND w10: RG5.7 3701.79,3136.79 3870,3305 3986,3305 4046,3365 v1(4320,3365) ; RG1.7 4220,3265 v1(4320,3365) ; RG6.7 4788.3,3247.66 4670.96,3365 v1(4320,3365)
  VCC w10: P1.6 3958.85,1524.89 4030.11,1524.89 4091.85,1463.15 4213.15,1463.15 4372.5,1622.5 4372.5,2042.5 4345,2070 v1(4295,2070) ; v1(4320,3365) 4320,3471 4369,3520 4470,3520 4600,3390 4600,3180 4515,3095 4515,2776 4388,2649 4388,2593.82 4404,2577.82 4404,2234 v1(4400,2230) ; RG4.5 4470,900 4803.28,900 5105,1201.72 5105,1797.53 5120.47,1813 5138,1813 5152,1827 5152,1913 v1(5130,1935)
  Bottom Layer w10: v1(4295,2070) 4295,2180 4345,2230 v1@4398,2230 ; v1(4400,2230) v1@4398,2230 ; v1(5130,1935) 5160,1905 5160,1780 5135,1755 4900,1755 4816,1839 4671,1839 4442,2068 4442,2186 v1@4398,2230
SHDN: P2.10 R1.1 U2.4 | length 1976.5
  Top Layer w10: U2.4 3974.76,2698.65 3989.11,2713 4045.08,2713 4055.66,2702.42 4055.66,2669.49 4065.15,2660 R1.1 v1(4095,2625)
  GND w10: v1(4095,2625) 4135,2665 4575,2665 4645,2595 v1(4730,2595)
  VCC w10: P2.10 4605.04,1719.96 4582,1743 4582,2369.88 4603,2390.88 4603,2483.96 4611,2491.96 4611,2515.4 4677.6,2582 4717,2582 v1(4730,2595)
SWCLK: HDR1.4 P2.13 | length 335.3
  GND w10: P2.13 4916.56,1877.44 4960,1834 4960,1760 HDR1.4
SWDIO: HDR1.2 P2.16 | length 361.9
  GND w10: P2.16 4748.84,1916 4904,1916 HDR1.2
VBAT: Battery1.2 C19.2 C20.1 C21.1 L1.2 R7.2 TP1.6 | length 1154.7
  Top Layer w20: R7.2 4110,1430 3985,1305 3985,1264.01 4174.01,1075 Battery1.2
  Bottom Layer w20: Battery1.2 4199,1094 C20.1 C21.1 4366,1100 C19.2 TP1.6 4565,1100 4585,1080 L1.2
VBUS: D1.1 R5.2 USB1.1 | length 754.4
  Top Layer w12: USB1.1@3771.31,1223.69 3812.62,1265 3900,1265 D1.1
  Top Layer w20: D1.1 4056.88,1115 4146.88,1025 v1(4340,1025)
  Bottom Layer w20: v1(4340,1025) 4395,1025 R5.2
VCC2.8V: C17.2 C27.2 C28.2 C29.2 C31.2 R1.2 R2.2 R3.2 R10.2 R11.2 R12.2 R13.2 R14.2 R15.2 R16.2 R17.2 R18.2 R19.2 R20.2 RG2.1 RG3.1 RG4.1 RG5.1 RG6.1 RT1.5 U1.1 U1.8 U1.13 U1.22 U2.8 U2.10 | length 9620.1
  Top Layer w8: U1.1 4307.81,1904.37 4326.41,1885.78 ; C29.2@4315,1765 4331.38,1781.38 U1.8 4331.38,1817.64 4328,1821.01 4328,1884.18 4326.41,1885.78 ; U1.22 4347.13,1906.5 4326.41,1885.78 ; U1.13 4427.64,1825.63 4445,1842.99 C31.2
  Top Layer w20: RG2.1 3520,1985 v1(3570,1985) 3625,1985 R11.2 3640.25,1995 R12.2@3705.25,1930 ; v1(3795,1505) R3.2 R10.2 ; v1(3925,2900) 3924,2899 C27.2 3865,2865 C28.2 3805,2830 3790,2815 3790,2735 3805,2720 R2.2 3845,2735 3945.24,2735 ; U2.10 3945.24,2735 ; R19.2 R20.2 4000,3186.6 RG5.1 4037.25,3225 4220,3042.25 v1(4220,3015) 4220,3010 4165,2955 4165,1815 4265,1715 ; U2.8 4004.29,2735 ; R1.2 4080,2735 4004.29,2735 ; R14.2 4160,880 RG4.1 ; C29.2 4265,1720 4265,1715 ; C31.2 4490,1845 4520,1815 4560,1815 4575,1800 4575,1600 ; R13.2 v1(4610,855) ; v1(4840,1350) 4785,1350 RT1.5 4708,1312 4575,1445 4575,1600 ; R17.2 4925,3270 R18.2 4980,3178.08 5041.81,3116.27 5041.81,3059.67 5040.12,3057.99 RG6.1 ; R16.2 5071,1800 5058,1787 ; R15.2 5045.4,1910 5027,1891.6 5027,1868.4 5058,1837.4 5058,1787 ; RG3.1 v1(5185,1700) 5079.4,1700 5058,1721.4 5058,1787 ; 3945.24,2735 4004.29,2735 ; 4265,1715 4315,1665 4510,1665 4575,1600
  GND w20: v1(4220,3015) 4297,3092 4783,3092 4855,3020 5018.11,3020 RG6.1 ; v1(4610,855) 4610,1120 v1(4840,1350) 4856.9,1350 4873.43,1333.47 5073.47,1333.47 5185,1445 v1(5185,1700)
  VCC w20: v1(3570,1985) 3650,1905 3650,1650 v1(3795,1505) 3795,1375 RG4.1 4283,887 4399.11,887 4431.11,855 v1(4610,855) ; v1(3925,2900) 3961.6,2936.6 RG5.1
VCC3.3V: C6.2 C7.2 C8.2 C9.2 C25.2 HDR1.6 P2.1 R4.2 RG1.1 RT2.5 U4.6 U5.2 U5.6 U6.6 | length 7060.3
  Top Layer w10: v1(4230,3465) 4205,3490 C9.2 4193.31,3503.31 U6.6 ; 4430,1505 4435,1500 ; RT2.5@4455,1530 RT2.5@4460,1530 ; R4.2 4620,1504.53 4599,1483.53 4599,1453.47 4685.06,1367.41 4749.81,1367.41 P2.1 ; U4.6@5099.06,1520.94 U4.6
  Top Layer w20: v1(3534,1343) 3506.69,1370.31 U5.6 3565.75,1580 U5.2 ; C25.2 4430,1505 RT2.5@4455,1530 ; 4435,1500 v1(4485,1500) ; P2.1 4835,1405 4950.94,1520.94 5099.06,1520.94 HDR1.6 ; U4.6 5135,1497.64 C7.2 5135,1387 5120,1372 C6.2
  GND w10: v1(4215,1500) 4215,1505 4220,1500 v1(4485,1500)
  GND w20: v1(3534,1343) 3567,1310 3765,1310 3940,1135 3940,1052.5 4050,942.5 4050,900 4105,845 4242,845 4305,908 4523,908 4575,960 4575,1135 4787.4,1347.4 P2.1
  VCC w10: v1(4215,1500) 4215,1865 4178,1902 4178,3011.18 4266.82,3100 4402.33,3100 4452,3149.67 4452,3202 RG1.1 4515,3450 4462,3503 4378,3503 4347,3472 4347,3348.82 4336.18,3338 4303.82,3338 4300.91,3340.91 4230,3411.82 v1(4230,3465) ; v1(4485,1500) v1@4490,1500
  VCC w20: v1@4490,1500 4635,1355 4737.4,1355 P2.1
VCC4.3V: C1.2 C2.2 C3.2 C4.2 C10.2 C11.2 C23.2 D5.2 RG5.3 RG6.3 SK1.4 SK2.4 SK3.4 SK4.4 U3.6 U7.2 U7.3 U8.2 U8.3 | length 7869.7
  Top Layer w10: v1(3783,1794) v1@3784,1793 ; C4.2@3850,1917.59 C4.2 ; SK2.4 SK2.4@4410,1161
  Top Layer w20: v1@3784,1793 3848,1793 3862,1807 3862,1905.59 C4.2@3850,1917.59 ; C4.2 C3.2 ; U3.6 4640,2890 4630,2900 C1.2 C2.2 4580,3060 4600,3080 4941.51,3080 RG6.3 ; C10.2 C11.2 4955,2060 v1(4975,2080)
  Top Layer w29: v1(4355,1235) 4375,1215 C23.2 ; SK2.4@4410,1161 C23.2 ; D5.2 C23.2 ; 4567,2360 4567,2450 v1(4567,2528)
  Top Layer w30: SK1.4 4452,2565 4567,2450 ; v1(4450,2360) 4567,2360
  GND w10: v1(3783,1794) 3896,1681 4211,1681 v1(4291,1601)
  VCC w10: 4545,3080 4545,3085
  VCC w29: v1(4450,1585) v1(4450,2360) 4450,2558.79 4545,2653.79 4545,3080 ; 4545,3085 4726.5,3266.5 4848.5,3266.5 4961.51,3153.49 RG6.3
  Bottom Layer w10: U7.3 U7.3@3845,1955 ; 3915,3135 3920,3135 ; SK3.4 4333,2483 4333,2433.82 4348.82,2418 4392,2418 v1(4450,2360)
  Bottom Layer w15: v1(3783,1794) 3844,1794 3880,1830 3880,1920 U7.3@3845,1955
  Bottom Layer w20: U7.3 U7.2
  Bottom Layer w29: 4180,3320 4800,3320 ; v1(4291,1601) 4291,1429 ; v1(4355,1235) 4355,1331 SK4.4 4291,1429 ; v1(4450,1585) 4447,1585 4291,1429 ; v1(4567,2528) 4590,2505 4590,2220 4608,2202 4928,2202 4975,2155 4975,2081 5036,2020 U8.2 U8.3
  Bottom Layer w30: RG5.3 3915,3135 ; 3920,3135 3995,3135 4180,3320 ; 4800,3320 4961.51,3158.49 RG6.3
VCC5V: C16.1 C24.1 D5.1 RT1.1 RT1.3 RT2.1 RT2.3 S2.2 | length 880.1
  Top Layer w20: RT2.1@4455,1445 4466,1456 4466,1456.53 4479.47,1470 4515,1470 4535,1450 4535,1440 RT2.3 4525,1430 C24.1 4575,1395 4650,1320 4650,1290.4 4625,1265.4 D5.1 C16.1 C16.1@4689,1160 ; RT1.1 C16.1@4689,1160 ; S2.2 4904.43,1218 RT1.3 4823,1203 4780,1160 C16.1@4689,1160
pads on no net: M1.0 M2.0 RG1.2 RG1.4 S1.0 S2.0 S2.3 SK4.1 U1.2 U1.3 U1.4 U1.5 U1.6 U1.7 U1.14 U1.15 U1.16 U1.17 U1.19 U1.21 U2.2 U2.3 U2.7 U2.11 USB1.2 USB1.3 USB1.4

## Polygon pours and split planes (outlines as drawn)
GND on Top Layer "Top Layer-No Net" (solid, remove dead copper, pour order 4): 3455,3565 3450,3560 3450,795 5245,795 5245,3570 3455,3570
GND on Bottom Layer "Top Layer-No Net" (solid, remove dead copper, pour order 0): 3455,3565 3450,3560 3450,795 5245,795 5245,3570 3455,3570

## Keep-outs
Keep-Out Layer:
  lines w10: 3450,1590 3450,2650 ; 3795,3350 3970,3350 ; 4075,2240 4075,2440 ; 4620,2240 4620,2440 ; 4905,3350 4710,3350 ; 5250,1590.33 cw(c4454.87,1590.34) 4579.26,805 ; 3450,2650 3655,2650 ; 3450,2650 3450.05,2450 4075,2450 4075,2230 3450.1,2230 3450.26,1590.33 ; 3450,2650 3655,2650 ; 3450.26,1590.33 ccw(c4245.38,1590.33) 4121,805 ; 3450.26,1590.33 3450.26,1562.22 3454.23,1506.13 3462.15,1450.47 3473.99,1395.5 3489.68,1341.5 3509.14,1288.75 3532.28,1237.51 3558.98,1188.02 3589.1,1140.55 3622.51,1095.32 3659.03,1052.57 3698.47,1012.5 3740.65,975.31 3785.35,941.2 3832.34,910.33 3881.4,882.86 3932.28,858.91 3984.72,838.63 4038.46,822.09 4093.23,809.4 4121,805 ; 3500,2705 cw(c4350,2705) 5200,2705 ; 3500,2705 3500,2732.83 3503.64,2788.36 3510.9,2843.54 3521.76,2898.12 3536.16,2951.87 3554.05,3004.57 3575.35,3055.99 3599.97,3105.9 3627.79,3154.1 3658.71,3200.37 3692.59,3244.52 3729.28,3286.36 3768.64,3325.72 3796.32,3350 3970,3350 ; 3500,2705 3655,2705 ; 3500,2705 3655,2705 ; 3655,2650 3655,2705 ; 3655,2650 3655,2705 ; 3970,3350 4150,3530 ; 3970,3350 4150,3530 ; 4121,805 4250,805 ; 4121,805 4250,805 ; 4150,3530 4144.79,3530 4156.88,3533.24 4211.46,3544.1 4266.64,3551.36 4322.17,3555 4377.83,3555 4433.36,3551.36 4488.54,3544.1 4534.26,3535 4525,3535 ; 4250,805 4310,865 ; 4250,805 4310,865 ; 4310,865 4390,865 ; 4310,865 4390,865 ; 4390,865 4450,805 ; 4390,865 4450,805 ; 4450,805 4579.26,805 ; 4450,805 4579.26,805 ; 4525,3535 4710,3350 ; 4525,3535 4710,3350 ; 4579.26,805 4607.03,809.4 4661.8,822.09 4715.54,838.63 4767.98,858.91 4818.86,882.86 4867.92,910.33 4914.91,941.2 4959.61,975.31 5001.79,1012.5 5041.23,1052.57 5077.75,1095.32 5111.15,1140.55 5141.28,1188.02 5167.98,1237.51 5191.12,1288.75 5210.58,1341.51 5226.27,1395.5 5238.1,1450.47 5246.03,1506.13 5250,1562.22 5250,1590 ; 4710,3350 4903.67,3350 4931.36,3325.72 4970.72,3286.36 5007.41,3244.52 5041.29,3200.37 5072.21,3154.1 5100.03,3105.9 5124.65,3055.99 5145.95,3004.57 5163.84,2951.87 5178.24,2898.12 5189.1,2843.54 5196.36,2788.36 5200,2732.83 5200,2705 ; 5050,2655 5250,2655 ; 5050,2655 5050,2705 ; 5050,2655 5250,2655 ; 5050,2655 5050,2705 ; 5050,2705 5200,2705 ; 5050,2705 5200,2705 ; 5250,1590 5250,2230 4620,2230 4620,2450 5250,2450 5250,2655 ; 5250,1590 5250,2655

## Silkscreen, mask and mechanical layers (free items; w line width, h text height)
Top Overlay:
  circle w10: c4345,2890 r200
  text "ZigBug V1.1 / 2017.10" at 3555,2850 h30

## Text inside footprints (layer, text, board x,y; h text height)
M1: Top Overlay "M" at 3980,2330 h30 r90
M2: Top Overlay "M" at 4720,2350 h30 r270